# EAGLE board P-LED-0005-V1A EAGLE Board (EAGLE 9.7.0)
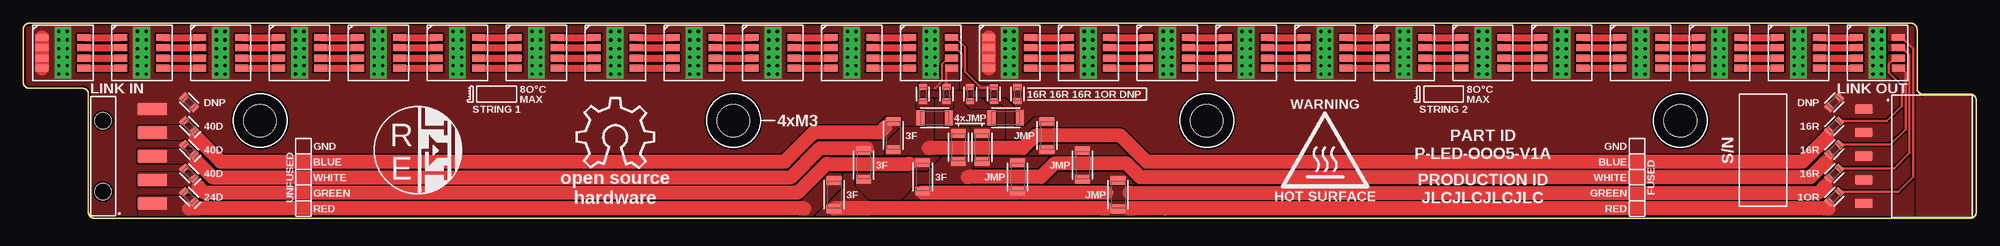
[diagram p0: board, top side]
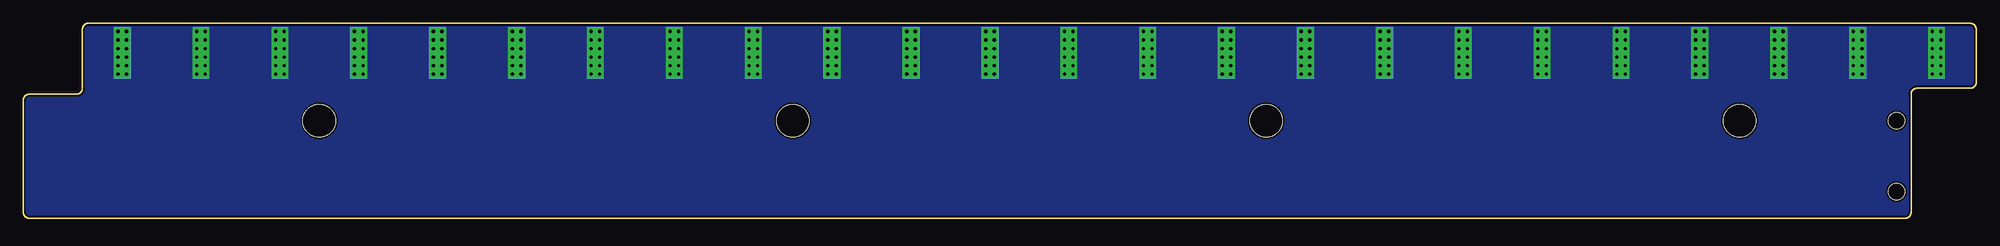
[diagram p1: board, bottom side, seen from below]

Size 209.55 x 20.95 mm. Coordinates in mm from the lower left corner, seen from the top.
Outline: 203.2,13.97 203.2,20.32 arc90 202.56,20.95 0.64,20.95 arc90 0,20.32 0,14.61 arc90 0.64,13.97 6.35,13.97 arc-90 6.99,13.34 6.99,0.64 arc90 7.62,0 208.91,0 arc90 209.55,0.64 209.55,12.7 arc90 208.91,13.34 203.84,13.34 arc-90 203.2,13.97
Copper layers (1*16): Top 0.035mm / dielectric 1.5mm / Bottom 0.035mm
Design rules "Fusion Electronics Design Rules *": minimum track width 6mil, minimum drill 0.35mm, track to track 6mil, track to pad 6mil, pad to pad 6mil, via to via 6mil, smd to smd 6mil, copper to edge 8mil, drill to drill 8mil, minimum pad ring 10mil, minimum via ring 10mil, stop-mask expansion 4mil, vias tented up to drill 10000mil, thermal gap 10mil
Holes 3.51 mm at 76.2,10.48 25.4,10.48 127,10.48 177.8,10.48
tRestrict: area 23.9,9 to 26.9,12; area 74.7,9 to 77.7,12; area 125.5,9 to 128.5,12; area 176.3,9 to 179.3,12
vRestrict: area 48.9,12.7 to 52.7,14; area 150.5,12.7 to 154.3,14; area 12.1,0.1 to 203.1,20.9; area 83.5,0.3 to 86.7,3.2; area 91.1,2.2 to 99.7,6.7; area 93.7,6.7 to 96.2,10.2; area 96.2,8.9 to 98.7,13.3; area 99.7,14.3 to 101,15.2; area 99.7,9.2 to 106.4,13.3; area 100.3,15.2 to 102.6,20.6; area 110.5,6.7 to 117.2,8.3; area 110.2,3.5 to 116.8,5.1; 9 more areas

## Footprints (pad centres in the part's own frame; a part is rotated, then mirrored left to right if it is on the bottom)
0603_POLARIZED = smd 0.61 x 0.914: A -0.762,0; K 0.762,0
1206 = smd 0.914 x 1.676: 1 -1.524,0; 2 1.524,0
5-PIN_1-ROW_MALE_SMD_HORIZONTAL = smd 1.27 x 3.175: 1 -5.08,0; 2 -2.54,0; 3 0,0; 4 2.54,0; 5 5.08,0 | hole 1.778: -3.81,5.283; 3.81,5.283
5-PIN_1-ROW_FEMALE_SMD_HORIZONTAL = smd 1.016 x 1.905: 1 -5.08,0; 2 -2.54,0; 3 0,0; 4 2.54,0; 5 5.08,0
0603 = smd 0.61 x 0.914: 1 -0.762,0; 2 0.762,0
IN-P55QSTGRGBW_FR4 = smd 1.5 x 0.75: BLUE_N 2.25,0.55; BLUE_P -2.25,0.55; GREEN_N 2.25,-0.55; GREEN_P -2.25,-0.55; RED_N 2.25,-1.65; RED_P -2.25,-1.65; WHITE_N 2.25,1.65; WHITE_P -2.25,1.65 | smd 1.8 x 5.5 bottom: PAD_B 0,0 | smd 1.8 x 5.5: PAD_T 0,0 | drill 0.35 square: VIA1 -0.457,2.286; VIA2 0.457,2.286; VIA3 -0.457,1.372; VIA4 0.457,1.372; VIA5 -0.457,0.457; VIA6 0.457,0.457; VIA7 -0.457,-0.457; VIA8 0.457,-0.457; VIA9 -0.457,-1.372; VIA10 0.457,-1.372; VIA11 -0.457,-2.286; VIA12 0.457,-2.286

## Placement (x,y rotation side)
D1  40 V  [0603_POLARIZED]  17.78,9.91 315 top
D2  40 V  [0603_POLARIZED]  17.78,7.37 315 top
D3  40 V  [0603_POLARIZED]  17.78,4.83 315 top
D4  24 V  [0603_POLARIZED]  17.78,2.29 315 top
F1  3 A  [1206]  93.34,8.89 270 top
F2  3 A  [1206]  90.17,5.71 270 top
F3  3 A  [1206]  96.52,4.45 270 top
F4  3 A  [1206]  87,2.54 270 top
J1  MALE  [5-PIN_1-ROW_MALE_SMD_HORIZONTAL]  13.84,6.67 90 top
J2  FEMALE  [5-PIN_1-ROW_FEMALE_SMD_HORIZONTAL]  197.49,6.67 270 top
JP1  [1206]  97.79,10.79 0 top
JP2  [1206]  105.41,10.79 0 top
JP3  [1206]  100.33,7.62 270 top
JP4  [1206]  102.87,7.62 270 top
JP5  [1206]  106.68,4.45 270 top
JP6  [1206]  109.86,8.89 270 top
JP7  [1206]  113.67,5.71 270 top
JP8  [1206]  117.47,2.54 270 top
JP9  DNP  [0603]  17.78,12.45 135 top
JP10  DNP  [0603]  106.68,13.34 270 top
JP11  DNP  [0603]  194.31,12.45 45 top
LED1  RGBW  [IN-P55QSTGRGBW_FR4]  4.25,17.78 180 top
LED2  RGBW  [IN-P55QSTGRGBW_FR4]  12.72,17.78 180 top
LED3  RGBW  [IN-P55QSTGRGBW_FR4]  21.18,17.78 180 top
LED4  RGBW  [IN-P55QSTGRGBW_FR4]  29.65,17.78 180 top
LED5  RGBW  [IN-P55QSTGRGBW_FR4]  38.11,17.78 180 top
LED6  RGBW  [IN-P55QSTGRGBW_FR4]  46.58,17.78 180 top
LED7  RGBW  [IN-P55QSTGRGBW_FR4]  55.04,17.78 180 top
LED8  RGBW  [IN-P55QSTGRGBW_FR4]  63.51,17.78 180 top
LED9  RGBW  [IN-P55QSTGRGBW_FR4]  71.97,17.78 180 top
LED10  RGBW  [IN-P55QSTGRGBW_FR4]  80.44,17.78 180 top
LED11  RGBW  [IN-P55QSTGRGBW_FR4]  88.9,17.78 180 top
LED12  RGBW  [IN-P55QSTGRGBW_FR4]  97.37,17.78 180 top
LED13  RGBW  [IN-P55QSTGRGBW_FR4]  105.83,17.78 180 top
LED14  RGBW  [IN-P55QSTGRGBW_FR4]  114.3,17.78 180 top
LED15  RGBW  [IN-P55QSTGRGBW_FR4]  122.76,17.78 180 top
LED16  RGBW  [IN-P55QSTGRGBW_FR4]  131.23,17.78 180 top
LED17  RGBW  [IN-P55QSTGRGBW_FR4]  139.69,17.78 180 top
LED18  RGBW  [IN-P55QSTGRGBW_FR4]  148.16,17.78 180 top
LED19  RGBW  [IN-P55QSTGRGBW_FR4]  156.62,17.78 180 top
LED20  RGBW  [IN-P55QSTGRGBW_FR4]  165.09,17.78 180 top
LED21  RGBW  [IN-P55QSTGRGBW_FR4]  173.55,17.78 180 top
LED22  RGBW  [IN-P55QSTGRGBW_FR4]  182.02,17.78 180 top
LED23  RGBW  [IN-P55QSTGRGBW_FR4]  190.48,17.78 180 top
LED24  RGBW  [IN-P55QSTGRGBW_FR4]  198.95,17.78 180 top
LOGO1  [RNE_PROFILE-LOGO_375]  42.35,7.3 0 top
LOGO2  [ISO_HOT-SURFACE_375_LABEL]  139.69,6.03 0 top
LOGO3  [OSHWA_OPEN-SOURCE_375_LABEL]  63.51,8.73 0 top
R1  10 Ω  [0603]  104.14,13.34 270 top
R2  16 Ω  [0603]  101.6,13.34 270 top
R3  16 Ω  [0603]  96.52,13.34 270 top
R4  16 Ω  [0603]  99.06,13.34 270 top
R5  10 Ω  [0603]  194.31,2.29 225 top
R6  16 Ω  [0603]  194.31,4.83 225 top
R7  16 Ω  [0603]  194.31,9.91 225 top
R8  16 Ω  [0603]  194.31,7.37 225 top

## Library data of the parts
D1-D4 F1-F4 JP1-JP11 R1-R8 = Standard Passive Components
J1 J2 = Pin Header Connectors
LED1-LED24 = Specialty LEDs
LOGO1-LOGO3 = Silkscreen Markings

## Nets
B1_RESISTOR [LED String]: LED12.BLUE_P R3.1
B2_RESISTOR [LED String]: LED24.BLUE_P R7.1
B_12 [LED String]: LED1.BLUE_P LED2.BLUE_N
B_23 [LED String]: LED2.BLUE_P LED3.BLUE_N
B_34 [LED String]: LED3.BLUE_P LED4.BLUE_N
B_45 [LED String]: LED4.BLUE_P LED5.BLUE_N
B_56 [LED String]: LED5.BLUE_P LED6.BLUE_N
B_67 [LED String]: LED6.BLUE_P LED7.BLUE_N
B_78 [LED String]: LED7.BLUE_P LED8.BLUE_N
B_89 [LED String]: LED8.BLUE_P LED9.BLUE_N
B_910 [LED String]: LED9.BLUE_P LED10.BLUE_N
B_1011 [LED String]: LED10.BLUE_P LED11.BLUE_N
B_1112 [LED String]: LED11.BLUE_P LED12.BLUE_N
B_1314 [LED String]: LED13.BLUE_P LED14.BLUE_N
B_1415 [LED String]: LED14.BLUE_P LED15.BLUE_N
B_1516 [LED String]: LED15.BLUE_P LED16.BLUE_N
B_1617 [LED String]: LED16.BLUE_P LED17.BLUE_N
B_1718 [LED String]: LED17.BLUE_P LED18.BLUE_N
B_1819 [LED String]: LED18.BLUE_P LED19.BLUE_N
B_1920 [LED String]: LED19.BLUE_P LED20.BLUE_N
B_2021 [LED String]: LED20.BLUE_P LED21.BLUE_N
B_2122 [LED String]: LED21.BLUE_P LED22.BLUE_N
B_2223 [LED String]: LED22.BLUE_P LED23.BLUE_N
B_2324 [LED String]: LED23.BLUE_P LED24.BLUE_N
BLUE [High Power]: F1.2 J2.2 R3.2 R7.2
BLUE_IN [High Power]: D1.K F1.1 J1.4
G1_RESISTOR [LED String]: LED12.GREEN_P R2.1
G2_RESISTOR [LED String]: LED24.GREEN_P R6.1
G_12 [LED String]: LED1.GREEN_P LED2.GREEN_N
G_23 [LED String]: LED2.GREEN_P LED3.GREEN_N
G_34 [LED String]: LED3.GREEN_P LED4.GREEN_N
G_45 [LED String]: LED4.GREEN_P LED5.GREEN_N
G_56 [LED String]: LED5.GREEN_P LED6.GREEN_N
G_67 [LED String]: LED6.GREEN_P LED7.GREEN_N
G_78 [LED String]: LED7.GREEN_P LED8.GREEN_N
G_89 [LED String]: LED8.GREEN_P LED9.GREEN_N
G_910 [LED String]: LED9.GREEN_P LED10.GREEN_N
G_1011 [LED String]: LED10.GREEN_P LED11.GREEN_N
G_1112 [LED String]: LED11.GREEN_P LED12.GREEN_N
G_1314 [LED String]: LED13.GREEN_P LED14.GREEN_N
G_1415 [LED String]: LED14.GREEN_P LED15.GREEN_N
G_1516 [LED String]: LED15.GREEN_P LED16.GREEN_N
G_1617 [LED String]: LED16.GREEN_P LED17.GREEN_N
G_1718 [LED String]: LED17.GREEN_P LED18.GREEN_N
G_1819 [LED String]: LED18.GREEN_P LED19.GREEN_N
G_1920 [LED String]: LED19.GREEN_P LED20.GREEN_N
G_2021 [LED String]: LED20.GREEN_P LED21.GREEN_N
G_2122 [LED String]: LED21.GREEN_P LED22.GREEN_N
G_2223 [LED String]: LED22.GREEN_P LED23.GREEN_N
G_2324 [LED String]: LED23.GREEN_P LED24.GREEN_N
GND [High Power]: D1.A D2.A D3.A D4.A J1.5 J2.1 JP1.1 JP1.2 JP2.1 JP2.2 JP9.1 JP9.2 JP10.1 JP10.2 JP11.1 JP11.2 LED1.BLUE_N LED1.GREEN_N LED1.PAD_B LED1.PAD_T LED1.RED_N LED1.VIA1 LED1.VIA2 LED1.VIA3 LED1.VIA4 LED1.VIA5 LED1.VIA6 LED1.VIA7 LED1.VIA8 LED1.VIA9 LED1.VIA10 LED1.VIA11 LED1.VIA12 LED1.WHITE_N LED2.PAD_B LED2.PAD_T LED2.VIA1 LED2.VIA2 LED2.VIA3 LED2.VIA4 LED2.VIA5 LED2.VIA6 LED2.VIA7 LED2.VIA8 LED2.VIA9 LED2.VIA10 LED2.VIA11 LED2.VIA12 LED3.PAD_B LED3.PAD_T LED3.VIA1 LED3.VIA2 LED3.VIA3 LED3.VIA4 LED3.VIA5 LED3.VIA6 LED3.VIA7 LED3.VIA8 LED3.VIA9 LED3.VIA10 LED3.VIA11 LED3.VIA12 LED4.PAD_B LED4.PAD_T LED4.VIA1 LED4.VIA2 LED4.VIA3 LED4.VIA4 LED4.VIA5 LED4.VIA6 LED4.VIA7 LED4.VIA8 LED4.VIA9 LED4.VIA10 LED4.VIA11 LED4.VIA12 LED5.PAD_B LED5.PAD_T LED5.VIA1 LED5.VIA2 LED5.VIA3 LED5.VIA4 LED5.VIA5 LED5.VIA6 LED5.VIA7 LED5.VIA8 LED5.VIA9 LED5.VIA10 LED5.VIA11 LED5.VIA12 LED6.PAD_B LED6.PAD_T LED6.VIA1 LED6.VIA2 LED6.VIA3 LED6.VIA4 LED6.VIA5 LED6.VIA6 LED6.VIA7 LED6.VIA8 LED6.VIA9 LED6.VIA10 LED6.VIA11 LED6.VIA12 LED7.PAD_B LED7.PAD_T LED7.VIA1 LED7.VIA2 LED7.VIA3 LED7.VIA4 LED7.VIA5 LED7.VIA6 LED7.VIA7 LED7.VIA8 LED7.VIA9 LED7.VIA10 LED7.VIA11 LED7.VIA12 LED8.PAD_B LED8.PAD_T LED8.VIA1 LED8.VIA2 LED8.VIA3 LED8.VIA4 LED8.VIA5 LED8.VIA6 LED8.VIA7 LED8.VIA8 LED8.VIA9 LED8.VIA10 LED8.VIA11 LED8.VIA12 LED9.PAD_B LED9.PAD_T LED9.VIA1 LED9.VIA2 LED9.VIA3 LED9.VIA4 LED9.VIA5 LED9.VIA6 LED9.VIA7 LED9.VIA8 LED9.VIA9 LED9.VIA10 LED9.VIA11 LED9.VIA12 LED10.PAD_B LED10.PAD_T LED10.VIA1 LED10.VIA2 LED10.VIA3 LED10.VIA4 LED10.VIA5 LED10.VIA6 LED10.VIA7 LED10.VIA8 LED10.VIA9 LED10.VIA10 LED10.VIA11 LED10.VIA12 LED11.PAD_B LED11.PAD_T LED11.VIA1 LED11.VIA2 LED11.VIA3 LED11.VIA4 LED11.VIA5 LED11.VIA6 LED11.VIA7 LED11.VIA8 LED11.VIA9 LED11.VIA10 LED11.VIA11 LED11.VIA12 LED12.PAD_B LED12.PAD_T LED12.VIA1 LED12.VIA2 LED12.VIA3 LED12.VIA4 LED12.VIA5 LED12.VIA6 LED12.VIA7 LED12.VIA8 LED12.VIA9 LED12.VIA10 LED12.VIA11 LED12.VIA12 LED13.BLUE_N LED13.GREEN_N LED13.PAD_B LED13.PAD_T LED13.RED_N LED13.VIA1 LED13.VIA2 LED13.VIA3 LED13.VIA4 LED13.VIA5 LED13.VIA6 LED13.VIA7 LED13.VIA8 LED13.VIA9 LED13.VIA10 LED13.VIA11 LED13.VIA12 LED13.WHITE_N LED14.PAD_B LED14.PAD_T LED14.VIA1 LED14.VIA2 LED14.VIA3 LED14.VIA4 LED14.VIA5 LED14.VIA6 LED14.VIA7 LED14.VIA8 LED14.VIA9 LED14.VIA10 LED14.VIA11 LED14.VIA12 LED15.PAD_B LED15.PAD_T LED15.VIA1 LED15.VIA2 LED15.VIA3 LED15.VIA4 LED15.VIA5 LED15.VIA6 LED15.VIA7 LED15.VIA8 LED15.VIA9 LED15.VIA10 LED15.VIA11 LED15.VIA12 LED16.PAD_B LED16.PAD_T LED16.VIA1 LED16.VIA2 LED16.VIA3 LED16.VIA4 LED16.VIA5 LED16.VIA6 LED16.VIA7 LED16.VIA8 LED16.VIA9 LED16.VIA10 LED16.VIA11 LED16.VIA12 LED17.PAD_B LED17.PAD_T LED17.VIA1 LED17.VIA2 LED17.VIA3 LED17.VIA4 LED17.VIA5 LED17.VIA6 LED17.VIA7 LED17.VIA8 LED17.VIA9 LED17.VIA10 LED17.VIA11 LED17.VIA12 LED18.PAD_B LED18.PAD_T LED18.VIA1 LED18.VIA2 LED18.VIA3 LED18.VIA4 LED18.VIA5 LED18.VIA6 LED18.VIA7 LED18.VIA8 LED18.VIA9 LED18.VIA10 LED18.VIA11 LED18.VIA12 LED19.PAD_B LED19.PAD_T LED19.VIA1 LED19.VIA2 LED19.VIA3 LED19.VIA4 LED19.VIA5 LED19.VIA6 LED19.VIA7 LED19.VIA8 LED19.VIA9 LED19.VIA10 LED19.VIA11 LED19.VIA12 LED20.PAD_B LED20.PAD_T LED20.VIA1 LED20.VIA2 LED20.VIA3 LED20.VIA4 LED20.VIA5 LED20.VIA6 LED20.VIA7 LED20.VIA8 LED20.VIA9 LED20.VIA10 LED20.VIA11 LED20.VIA12 LED21.PAD_B LED21.PAD_T LED21.VIA1 LED21.VIA2 LED21.VIA3 LED21.VIA4 LED21.VIA5 LED21.VIA6 LED21.VIA7 LED21.VIA8 LED21.VIA9 LED21.VIA10 LED21.VIA11 LED21.VIA12 LED22.PAD_B LED22.PAD_T LED22.VIA1 LED22.VIA2 LED22.VIA3 LED22.VIA4 LED22.VIA5 LED22.VIA6 LED22.VIA7 LED22.VIA8 LED22.VIA9 LED22.VIA10 LED22.VIA11 LED22.VIA12 LED23.PAD_B LED23.PAD_T LED23.VIA1 LED23.VIA2 LED23.VIA3 LED23.VIA4 LED23.VIA5 LED23.VIA6 LED23.VIA7 LED23.VIA8 LED23.VIA9 LED23.VIA10 LED23.VIA11 LED23.VIA12 LED24.PAD_B LED24.PAD_T LED24.VIA1 LED24.VIA2 LED24.VIA3 LED24.VIA4 LED24.VIA5 LED24.VIA6 LED24.VIA7 LED24.VIA8 LED24.VIA9 LED24.VIA10 LED24.VIA11 LED24.VIA12
GREEN [High Power]: F3.2 J2.4 JP5.2 R6.2
GREEN_BRG [High Power]: JP4.1 R2.2
GREEN_BRG_2 [High Power]: JP4.2 JP5.1
GREEN_IN [High Power]: D3.K F3.1 J1.2
R1_RESISTOR [LED String]: LED12.RED_P R1.1
R2_RESISTOR [LED String]: LED24.RED_P R5.1
R_12 [LED String]: LED1.RED_P LED2.RED_N
R_23 [LED String]: LED2.RED_P LED3.RED_N
R_34 [LED String]: LED3.RED_P LED4.RED_N
R_45 [LED String]: LED4.RED_P LED5.RED_N
R_56 [LED String]: LED5.RED_P LED6.RED_N
R_67 [LED String]: LED6.RED_P LED7.RED_N
R_78 [LED String]: LED7.RED_P LED8.RED_N
R_89 [LED String]: LED8.RED_P LED9.RED_N
R_910 [LED String]: LED9.RED_P LED10.RED_N
R_1011 [LED String]: LED10.RED_P LED11.RED_N
R_1112 [LED String]: LED11.RED_P LED12.RED_N
R_1314 [LED String]: LED13.RED_P LED14.RED_N
R_1415 [LED String]: LED14.RED_P LED15.RED_N
R_1516 [LED String]: LED15.RED_P LED16.RED_N
R_1617 [LED String]: LED16.RED_P LED17.RED_N
R_1718 [LED String]: LED17.RED_P LED18.RED_N
R_1819 [LED String]: LED18.RED_P LED19.RED_N
R_1920 [LED String]: LED19.RED_P LED20.RED_N
R_2021 [LED String]: LED20.RED_P LED21.RED_N
R_2122 [LED String]: LED21.RED_P LED22.RED_N
R_2223 [LED String]: LED22.RED_P LED23.RED_N
R_2324 [LED String]: LED23.RED_P LED24.RED_N
RED [High Power]: F4.2 J2.5 JP8.2 R5.2
RED_BRG [High Power]: JP6.1 R1.2
RED_BRG_2 [High Power]: JP6.2 JP7.1
RED_BRG_3 [High Power]: JP7.2 JP8.1
RED_IN [High Power]: D4.K F4.1 J1.1
W1_RESISTOR [LED String]: LED12.WHITE_P R4.1
W2_RESISTOR [LED String]: LED24.WHITE_P R8.1
W_12 [LED String]: LED1.WHITE_P LED2.WHITE_N
W_23 [LED String]: LED2.WHITE_P LED3.WHITE_N
W_34 [LED String]: LED3.WHITE_P LED4.WHITE_N
W_45 [LED String]: LED4.WHITE_P LED5.WHITE_N
W_56 [LED String]: LED5.WHITE_P LED6.WHITE_N
W_67 [LED String]: LED6.WHITE_P LED7.WHITE_N
W_78 [LED String]: LED7.WHITE_P LED8.WHITE_N
W_89 [LED String]: LED8.WHITE_P LED9.WHITE_N
W_910 [LED String]: LED9.WHITE_P LED10.WHITE_N
W_1011 [LED String]: LED10.WHITE_P LED11.WHITE_N
W_1112 [LED String]: LED11.WHITE_P LED12.WHITE_N
W_1314 [LED String]: LED13.WHITE_P LED14.WHITE_N
W_1415 [LED String]: LED14.WHITE_P LED15.WHITE_N
W_1516 [LED String]: LED15.WHITE_P LED16.WHITE_N
W_1617 [LED String]: LED16.WHITE_P LED17.WHITE_N
W_1718 [LED String]: LED17.WHITE_P LED18.WHITE_N
W_1819 [LED String]: LED18.WHITE_P LED19.WHITE_N
W_1920 [LED String]: LED19.WHITE_P LED20.WHITE_N
W_2021 [LED String]: LED20.WHITE_P LED21.WHITE_N
W_2122 [LED String]: LED21.WHITE_P LED22.WHITE_N
W_2223 [LED String]: LED22.WHITE_P LED23.WHITE_N
W_2324 [LED String]: LED23.WHITE_P LED24.WHITE_N
WHITE [High Power]: F2.2 J2.3 JP3.2 R8.2
WHITE_BRG [High Power]: JP3.1 R4.2
WHITE_IN [High Power]: D2.K F2.1 J1.3

## Tracks (layer width: path | path; a pad name or v marks a point on that pad's centre or on a via)
B1_RESISTOR
  Top 0.254: LED12.BLUE_P 99.23,17.23 98.58,16.58 98.58,14.76 97.83,14.01
  pour Top (no thermals): 96.14,13.87 98.37,13.87 98.37,14.67 96.44,14.67 96.14,14.37
B2_RESISTOR
  Top 0.254: LED24.BLUE_P 200.81,17.23 200.16,16.58 200.16,15.68 201.57,14.27 201.57,12.08 199.93,10.45 R7.1
  pour Top (no thermals): 200.53,16.92 200.56,16.93 201.87,16.93 201.87,17.53 200.12,17.53 200.12,16.59 200.19,16.59
B_12
  Top 0.749: LED1.BLUE_P LED2.BLUE_N
B_23
  Top 0.749: LED2.BLUE_P LED3.BLUE_N
B_34
  Top 0.749: LED3.BLUE_P LED4.BLUE_N
B_45
  Top 0.749: LED4.BLUE_P LED5.BLUE_N
B_56
  Top 0.749: LED5.BLUE_P LED6.BLUE_N
B_67
  Top 0.749: LED6.BLUE_P LED7.BLUE_N
B_78
  Top 0.749: LED7.BLUE_P LED8.BLUE_N
B_89
  Top 0.749: LED8.BLUE_P LED9.BLUE_N
B_910
  Top 0.749: LED9.BLUE_P LED10.BLUE_N
B_1011
  Top 0.749: LED10.BLUE_P LED11.BLUE_N
B_1112
  Top 0.749: LED11.BLUE_P LED12.BLUE_N
B_1314
  Top 0.749: LED13.BLUE_P LED14.BLUE_N
B_1415
  Top 0.749: LED14.BLUE_P LED15.BLUE_N
B_1516
  Top 0.749: LED15.BLUE_P LED16.BLUE_N
B_1617
  Top 0.749: LED16.BLUE_P LED17.BLUE_N
B_1718
  Top 0.749: LED17.BLUE_P LED18.BLUE_N
B_1819
  Top 0.749: LED18.BLUE_P LED19.BLUE_N
B_1920
  Top 0.749: LED19.BLUE_P LED20.BLUE_N
B_2021
  Top 0.749: LED20.BLUE_P LED21.BLUE_N
B_2122
  Top 0.749: LED21.BLUE_P LED22.BLUE_N
B_2223
  Top 0.749: LED22.BLUE_P LED23.BLUE_N
B_2324
  Top 0.749: LED23.BLUE_P LED24.BLUE_N
BLUE
  Top 1.524: 193.53,8.7 190.93,6.1 120.53,6.1 117.74,8.89 108.58,8.89 107.23,7.54 97.16,7.54
  pour Top (no thermals): 94.28,9.73 92.8,8.24 92.77,8.23 92.59,8.23 92.59,6.86 97.64,6.86 97.64,12.8 97.34,12.8 95.89,12.8 95.89,11.86 96.89,11.86 96.91,11.85 96.94,11.83 96.95,11.8 96.95,9.79 96.94,9.76 96.91,9.74 96.89,9.73
  pour Top (no thermals): 201.62,11.63 200.29,10.3 200.27,10.29 194.16,10.29 192.74,8.87 193.71,7.9 193.86,8.05 193.89,8.06 200.01,8.06 201.62,9.68
BLUE_IN
  Top 1.524: 18.54,8.73 21.17,6.1 81.69,6.1 84.82,9.22 91.95,9.22 92.51,9.79
  pour Top (no thermals): 12.33,9.93 12.33,8.49 17.79,8.49 17.82,8.48 18.33,7.97 19.3,8.93 18.3,9.93
  pour Top (no thermals): 92.55,10.79 91.68,9.92 91.65,9.91 91.52,9.91 91.52,8.54 92.65,8.54 94.11,10 94.11,10.79
G1_RESISTOR
  Top 0.254: LED12.GREEN_P 100,18.33 100.65,17.69 100.65,16.19
  pour Top (no thermals): 101.98,13.87 101.98,14.37 100.71,15.64 100.7,15.67 100.7,16.43 100.6,16.43 100.6,13.87
G2_RESISTOR
  Top 0.254: LED24.GREEN_P 201.22,18.31 201.6,18.31 202.39,17.53 202.39,7 200.76,5.37 R6.1
  pour Top (no thermals): 201.83,18.03 201.86,18.02 202.44,17.44 202.44,18.07 201.88,18.63 200.12,18.63 200.12,18.03
G_12
  Top 0.749: LED1.GREEN_P LED2.GREEN_N
G_23
  Top 0.749: LED2.GREEN_P LED3.GREEN_N
G_34
  Top 0.749: LED3.GREEN_P LED4.GREEN_N
G_45
  Top 0.749: LED4.GREEN_P LED5.GREEN_N
G_56
  Top 0.749: LED5.GREEN_P LED6.GREEN_N
G_67
  Top 0.749: LED6.GREEN_P LED7.GREEN_N
G_78
  Top 0.749: LED7.GREEN_P LED8.GREEN_N
G_89
  Top 0.749: LED8.GREEN_P LED9.GREEN_N
G_910
  Top 0.749: LED9.GREEN_P LED10.GREEN_N
G_1011
  Top 0.749: LED10.GREEN_P LED11.GREEN_N
G_1112
  Top 0.749: LED11.GREEN_P LED12.GREEN_N
G_1314
  Top 0.749: LED13.GREEN_P LED14.GREEN_N
G_1415
  Top 0.749: LED14.GREEN_P LED15.GREEN_N
G_1516
  Top 0.749: LED15.GREEN_P LED16.GREEN_N
G_1617
  Top 0.749: LED16.GREEN_P LED17.GREEN_N
G_1718
  Top 0.749: LED17.GREEN_P LED18.GREEN_N
G_1819
  Top 0.749: LED18.GREEN_P LED19.GREEN_N
G_1920
  Top 0.749: LED19.GREEN_P LED20.GREEN_N
G_2021
  Top 0.749: LED20.GREEN_P LED21.GREEN_N
G_2122
  Top 0.749: LED21.GREEN_P LED22.GREEN_N
G_2223
  Top 0.749: LED22.GREEN_P LED23.GREEN_N
G_2324
  Top 0.749: LED23.GREEN_P LED24.GREEN_N
GND
  Top 1.499: LED1.RED_N LED1.GREEN_N LED1.BLUE_N LED1.WHITE_N | LED13.RED_N LED13.GREEN_N LED13.BLUE_N LED13.WHITE_N
  pour Top (rank 2, no thermals): 7.62,0.08 208.91,0.08 209.02,0.09 209.13,0.12 209.23,0.17 209.31,0.24 209.38,0.32 209.43,0.42 209.46,0.53 209.47,0.64 209.47,12.7 209.46,12.81 209.43,12.91 209.38,13.01 209.31,13.09 209.23,13.16 209.13,13.22 209.02,13.25 208.91,13.26 203.85,13.26 203.84,13.26 203.83,13.26 203.82,13.26 203.82,13.26 203.71,13.27 203.7,13.27 203.7,13.27 203.69,13.27 203.68,13.28 203.58,13.31 203.57,13.31 203.56,13.31 203.56,13.31 203.55,13.32 203.45,13.37 203.45,13.37 203.44,13.38 203.43,13.38 203.43,13.39 203.34,13.46 203.34,13.46 203.33,13.47 203.33,13.47 203.32,13.48 203.25,13.56 203.25,13.57 203.24,13.57 203.24,13.58 203.24,13.59 203.18,13.68 203.18,13.69 203.18,13.7 203.17,13.7 203.17,13.71 203.14,13.82 203.14,13.82 203.14,13.83 203.13,13.84 203.14,13.85 203.13,13.95 203.12,13.95 203.12,13.97 203.12,13.98 203.12,13.98 203.12,20.32 203.11,20.43 203.08,20.53 203.03,20.63 202.96,20.71 202.88,20.78 202.78,20.84 202.67,20.87 202.56,20.88 0.64,20.88 0.53,20.87 0.42,20.84 0.32,20.78 0.24,20.71 0.17,20.63 0.12,20.53 0.09,20.43 0.08,20.32 0.08,14.61 0.09,14.5 0.12,14.39 0.17,14.29 0.24,14.21 0.32,14.14 0.42,14.09 0.53,14.06 0.64,14.05 6.34,14.05 6.34,14.05 6.35,14.05 6.37,14.05 6.37,14.04 6.47,14.03 6.48,14.04 6.49,14.03 6.5,14.03 6.5,14.03 6.61,14 6.62,14 6.62,13.99 6.63,13.99 6.64,13.99 6.73,13.93 6.74,13.93 6.75,13.93 6.75,13.92 6.76,13.92 6.84,13.85 6.85,13.84 6.85,13.84 6.86,13.83 6.86,13.83 6.93,13.74 6.94,13.74 6.94,13.73 6.95,13.72 6.95,13.72 7,13.62 7.01,13.61 7.01,13.61 7.01,13.6 7.01,13.59 7.04,13.49 7.05,13.48 7.05,13.47 7.05,13.47 7.05,13.46 7.06,13.35 7.06,13.35 7.06,13.34 7.06,13.33 7.06,13.32 7.06,0.64 7.07,0.53 7.1,0.42 7.16,0.32 7.23,0.24 7.31,0.17 7.41,0.12 7.51,0.09
  pour Bottom (no thermals): 7.62,0.08 208.91,0.08 209.02,0.09 209.13,0.12 209.23,0.17 209.31,0.24 209.38,0.32 209.43,0.42 209.46,0.53 209.47,0.64 209.47,12.7 209.46,12.81 209.43,12.91 209.38,13.01 209.31,13.09 209.23,13.16 209.13,13.22 209.02,13.25 208.91,13.26 203.85,13.26 203.84,13.26 203.83,13.26 203.82,13.26 203.82,13.26 203.71,13.27 203.7,13.27 203.7,13.27 203.69,13.27 203.68,13.28 203.58,13.31 203.57,13.31 203.56,13.31 203.56,13.31 203.55,13.32 203.45,13.37 203.45,13.37 203.44,13.38 203.43,13.38 203.43,13.39 203.34,13.46 203.34,13.46 203.33,13.47 203.33,13.47 203.32,13.48 203.25,13.56 203.25,13.57 203.24,13.57 203.24,13.58 203.24,13.59 203.18,13.68 203.18,13.69 203.18,13.7 203.17,13.7 203.17,13.71 203.14,13.82 203.14,13.82 203.14,13.83 203.13,13.84 203.14,13.85 203.13,13.95 203.12,13.95 203.12,13.97 203.12,13.98 203.12,13.98 203.12,20.32 203.11,20.43 203.08,20.53 203.03,20.63 202.96,20.71 202.88,20.78 202.78,20.84 202.67,20.87 202.56,20.88 0.64,20.88 0.53,20.87 0.42,20.84 0.32,20.78 0.24,20.71 0.17,20.63 0.12,20.53 0.09,20.43 0.08,20.32 0.08,14.61 0.09,14.5 0.12,14.39 0.17,14.29 0.24,14.21 0.32,14.14 0.42,14.09 0.53,14.06 0.64,14.05 6.34,14.05 6.34,14.05 6.35,14.05 6.37,14.05 6.37,14.04 6.47,14.03 6.48,14.04 6.49,14.03 6.5,14.03 6.5,14.03 6.61,14 6.62,14 6.62,13.99 6.63,13.99 6.64,13.99 6.73,13.93 6.74,13.93 6.75,13.93 6.75,13.92 6.76,13.92 6.84,13.85 6.85,13.84 6.85,13.84 6.86,13.83 6.86,13.83 6.93,13.74 6.94,13.74 6.94,13.73 6.95,13.72 6.95,13.72 7,13.62 7.01,13.61 7.01,13.61 7.01,13.6 7.01,13.59 7.04,13.49 7.05,13.48 7.05,13.47 7.05,13.47 7.05,13.46 7.06,13.35 7.06,13.35 7.06,13.34 7.06,13.33 7.06,13.32 7.06,0.64 7.07,0.53 7.1,0.42 7.16,0.32 7.23,0.24 7.31,0.17 7.41,0.12 7.51,0.09
  pour Top (no thermals): 203.14,0.08 208.91,0.08 209.02,0.09 209.13,0.12 209.23,0.17 209.31,0.24 209.38,0.32 209.43,0.42 209.46,0.53 209.47,0.64 209.47,12.7 209.46,12.81 209.43,12.91 209.38,13.01 209.31,13.09 209.23,13.16 209.13,13.22 209.02,13.25 208.91,13.26 203.14,13.26
GREEN
  Top 1.524: 118.75,2.73 192.64,2.73 193.38,3.46 | 116.2,2.73 107.31,2.73 | 106.68,2.73 96.52,2.73
  pour Top (no thermals): 94.48,2.05 97.71,2.05 97.71,3.42 95.85,3.42
  pour Top (no thermals): 116.28,2.04 118.67,2.04 118.67,3.38 116.28,3.38
  pour Top (no thermals): 105.49,2.04 107.87,2.04 107.87,3.43 105.49,3.43
  pour Top (no thermals): 202.43,6.54 201.12,5.23 201.09,5.21 194.16,5.21 192.74,3.8 193.71,2.83 193.85,2.97 193.88,2.98 200.83,2.98 202.43,4.58
GREEN_BRG
  pour Top (no thermals): 104.56,9.77 104.54,9.74 104.51,9.73 101.75,9.73 101.75,8.52 105.26,8.52 105.26,11.66 104.88,12.03 103.62,12.03 103.59,12.05 102.84,12.8 101.22,12.8 101.22,12.27 101.62,11.86 104.51,11.86 104.54,11.85 104.56,11.83 104.57,11.8 104.57,9.79
GREEN_BRG_2
  pour Top (no thermals): 102.11,5.42 108.79,5.42 109.92,6.54 102.11,6.54
GREEN_IN
  Top 1.524: 18.79,3.38 19.44,2.73 83.08,2.73 86.21,5.86 95.09,5.86
  pour Top (no thermals): 12.33,4.85 12.33,3.4 17.78,3.4 17.81,3.39 18.44,2.76 19.41,3.73 19.09,4.06 19.09,4.06 18.3,4.85
  pour Top (no thermals): 94.69,5.18 96.89,5.18 98.26,6.55 94.69,6.55
R1_RESISTOR
  Top 0.254: LED12.RED_P 100.01,19.43 101.05,18.38 101.05,15.78 102.77,14.06 103.6,14.06
  pour Top (no thermals): 102.42,13.87 104.52,13.87 104.52,14.33 102.42,14.33
R2_RESISTOR
  Top 0.254: LED24.RED_P 201.58,19.43 202.79,18.22 202.79,4.45 201.16,2.83 R5.1
  pour Top (no thermals): 201.8,19.13 201.82,19.12 202.84,18.1 202.84,20.71 202.84,20.76 202.82,20.8 202.8,20.83 202.76,20.86 202.73,20.87 202.68,20.88 200.12,20.88 200.12,19.13
R_12
  Top 0.749: LED1.RED_P LED2.RED_N
R_23
  Top 0.749: LED2.RED_P LED3.RED_N
R_34
  Top 0.749: LED3.RED_P LED4.RED_N
R_45
  Top 0.749: LED4.RED_P LED5.RED_N
R_56
  Top 0.749: LED5.RED_P LED6.RED_N
R_67
  Top 0.749: LED6.RED_P LED7.RED_N
R_78
  Top 0.749: LED7.RED_P LED8.RED_N
R_89
  Top 0.749: LED8.RED_P LED9.RED_N
R_910
  Top 0.749: LED9.RED_P LED10.RED_N
R_1011
  Top 0.749: LED10.RED_P LED11.RED_N
R_1112
  Top 0.749: LED11.RED_P LED12.RED_N
R_1314
  Top 0.749: LED13.RED_P LED14.RED_N
R_1415
  Top 0.749: LED14.RED_P LED15.RED_N
R_1516
  Top 0.749: LED15.RED_P LED16.RED_N
R_1617
  Top 0.749: LED16.RED_P LED17.RED_N
R_1718
  Top 0.749: LED17.RED_P LED18.RED_N
R_1819
  Top 0.749: LED18.RED_P LED19.RED_N
R_1920
  Top 0.749: LED19.RED_P LED20.RED_N
R_2021
  Top 0.749: LED20.RED_P LED21.RED_N
R_2122
  Top 0.749: LED21.RED_P LED22.RED_N
R_2223
  Top 0.749: LED22.RED_P LED23.RED_N
R_2324
  Top 0.749: LED23.RED_P LED24.RED_N
RED
  Top 1.524: 116.2,1.04 87,1.04 | 193.71,1.05 122.56,1.05 118.75,1.05
  pour Top (no thermals): 88.06,3.23 88.05,3.2 84.93,0.08 90.77,0.08 90.77,1.69 89.11,3.34 89.1,3.37 89.1,4.88 88.06,4.88
  pour Top (no thermals): 115.65,0.08 119.3,0.08 119.3,1.73 115.65,1.73
  pour Top (no thermals): 202.83,4 201.51,2.68 201.49,2.67 194.15,2.67 193.12,1.63 193.12,0.08 202.83,0.08
RED_BRG
  pour Top (no thermals): 105.55,11.8 105.56,11.77 105.56,8.51 106.8,8.51 108.17,9.88 108.19,9.89 110.62,9.89 110.62,10.79 108.53,10.79 107.47,9.74 107.45,9.73 106.3,9.73 106.28,9.74 106.25,9.76 106.24,9.79 106.24,11.91 105.35,12.8 103.27,12.8 103.73,12.34 104.98,12.34 105.01,12.33
RED_BRG_2
  pour Top (no thermals): 107.95,6.85 118.38,6.85 117.33,7.9 109,7.9
RED_BRG_3
  pour Top (no thermals): 116.55,3.68 118.45,3.68 118.47,3.7 118.5,3.72 119.14,3.72 117.97,4.88 111.05,4.88 109.91,3.73 116.49,3.72 116.5,3.72 116.5,3.72 116.5,3.72 116.52,3.71 116.53,3.7 116.53,3.7 116.53,3.7 116.54,3.69
RED_IN
  Top 1.524: 83.82,1.04 17.78,1.04
  pour Top (no thermals): 12.36,0.1 18.95,0.1 18.95,1.62 18.29,2.28 12.36,2.28
  pour Top (no thermals): 83.26,0.08 84.49,0.08 87.76,3.34 87.76,4.88 86.63,4.88 83.26,1.51
W1_RESISTOR
  Top 0.254: LED12.WHITE_P 98.99,16.13 98.99,14.28 99.16,14.12
  pour Top (no thermals): 98.94,14.64 98.93,14.61 98.68,14.36 98.68,13.87 100.29,13.87 100.29,16.43 98.94,16.43
W2_RESISTOR
  Top 0.254: LED24.WHITE_P 201.52,16.13 201.98,15.67 201.98,9.54 200.34,7.91 R8.1
  pour Top (no thermals): 201.99,14.34 202.03,14.34 202.03,16.43 200.52,16.43 200.52,15.82
W_12
  Top 0.749: LED1.WHITE_P LED2.WHITE_N
W_23
  Top 0.749: LED2.WHITE_P LED3.WHITE_N
W_34
  Top 0.749: LED3.WHITE_P LED4.WHITE_N
W_45
  Top 0.749: LED4.WHITE_P LED5.WHITE_N
W_56
  Top 0.749: LED5.WHITE_P LED6.WHITE_N
W_67
  Top 0.749: LED6.WHITE_P LED7.WHITE_N
W_78
  Top 0.749: LED7.WHITE_P LED8.WHITE_N
W_89
  Top 0.749: LED8.WHITE_P LED9.WHITE_N
W_910
  Top 0.749: LED9.WHITE_P LED10.WHITE_N
W_1011
  Top 0.749: LED10.WHITE_P LED11.WHITE_N
W_1112
  Top 0.749: LED11.WHITE_P LED12.WHITE_N
W_1314
  Top 0.749: LED13.WHITE_P LED14.WHITE_N
W_1415
  Top 0.749: LED14.WHITE_P LED15.WHITE_N
W_1516
  Top 0.749: LED15.WHITE_P LED16.WHITE_N
W_1617
  Top 0.749: LED16.WHITE_P LED17.WHITE_N
W_1718
  Top 0.749: LED17.WHITE_P LED18.WHITE_N
W_1819
  Top 0.749: LED18.WHITE_P LED19.WHITE_N
W_1920
  Top 0.749: LED19.WHITE_P LED20.WHITE_N
W_2021
  Top 0.749: LED20.WHITE_P LED21.WHITE_N
W_2122
  Top 0.749: LED21.WHITE_P LED22.WHITE_N
W_2223
  Top 0.749: LED22.WHITE_P LED23.WHITE_N
W_2324
  Top 0.749: LED23.WHITE_P LED24.WHITE_N
WHITE
  Top 1.524: 193.42,6.04 191.79,4.42 119.83,4.42 118.38,5.87 110.64,5.87 109.19,4.42 101.37,4.42
  pour Top (no thermals): 98.69,6.54 97.03,4.88 97,4.87 89.41,4.87 89.41,3.48 90.84,2.05 94.05,2.05 95.72,3.72 95.75,3.73 101.8,3.73 101.8,6.54
  pour Top (no thermals): 202.03,9.09 200.7,7.77 200.67,7.75 194.16,7.75 192.75,6.34 193.72,5.37 193.86,5.51 193.89,5.52 200.36,5.52 202.03,7.19
WHITE_BRG
  pour Top (no thermals): 98.66,11.85 98.69,11.86 99.7,11.86 99.7,12.8 97.94,12.8 97.94,8.53 101.45,8.53 101.45,9.73 98.69,9.73 98.66,9.74 98.64,9.76 98.63,9.79 98.63,11.8 98.64,11.83
WHITE_IN
  Top 1.524: 18.56,6.15 20.3,4.41 82.38,4.41 85.51,7.54 90.5,7.54
  pour Top (no thermals): 12.33,7.39 12.33,5.95 17.78,5.95 17.81,5.94 18.25,5.5 19.22,6.47 18.3,7.39
  pour Top (no thermals): 88.98,6.86 92.28,6.86 92.28,8.23 88.98,8.23

## Text on the board
tPlace: LINK IN | 8O°C | 8O°C | LINK OUT | MAX | 16R 16R 16R 1OR DNP | MAX | DNP | STRING 1 | STRING 2 | DNP | 4xJMP | 40D | 4xM3 | 16R | 3F | JMP | GND | PART ID / P-LED-OOO5-V1A | GND | 40D | S/N | 16R | BLUE | 3F | JMP | BLUE | 40D | 16R | UNFUSED | WHITE | 3F | JMP | WHITE | FUSED | GREEN | 3F | JMP | PRODUCTION ID / JLCJLCJLCJLC | GREEN | 24D | 1OR | RED | RED